# Altium PCB DIOT_SYS_extender_card.PcbDoc (part 3 of 6)
Units mm, origin at the board's own origin, x right, y up, seen from the top; angles counter-clockwise.
Board outline 280.04 x 100 mm, 6 copper layers (Top Layer, L2GND, L3, L4, L5GND, Bottom Layer), stack 1.558 mm thick; 18 components, 344 nets, 1062 pads, 179 vias.
Unrouted connection lines stored in the file: 389.
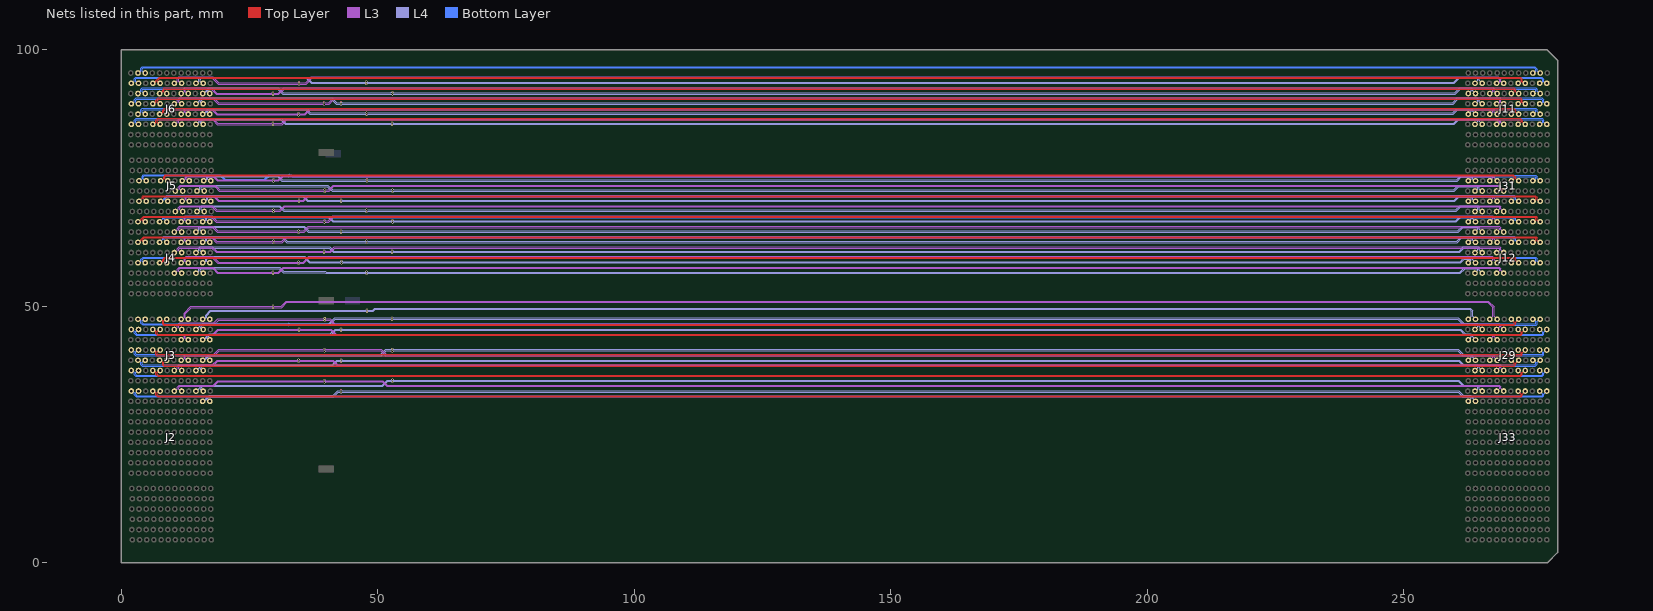
[diagram p7: the nets of this part, all layers, seen from the top]

## Via types
v1: diameter 0.4, hole 0.2, Top Layer to Bottom Layer, tented both sides, 179 vias

## Nets (pads, with @x,y where several pads share a name; then routed paths per layer and width w, separated by ;. In a path a pad name is that pad's centre, name@x,y a point inside that pad or via, vN(x,y) a via of type N, cw(c..) or ccw(c..) an arc to the next point about the centre after c; other vN are vias at no path point) (continued)
SLOT3.LVDS_11_N: J6.B3 J11.B3 | length 276.6
  Bottom Layer w0.11: J6.B3@3.4,85.5 3.16,85.5 2.82,85.84 2.82,86.2 3.045,86.425 37.638,86.425 276.908,86.425 277.119,86.215 277.119,85.9 276.719,85.5 J11.B3@276.539,85.5
SLOT3.LVDS_11_P: J6.A3 J11.A3 | length 277.4
  Bottom Layer w0.11: J6.A3@2,85.5 2.24,85.5 2.58,85.84 2.58,86.299 2.946,86.665 37.638,86.665 277.008,86.665 277.359,86.314 277.359,85.9 277.759,85.5 J11.A3@277.939,85.5
SLOT3.LVDS_12_N: J6.E3 J11.E3 | length 268.2
  Top Layer w0.11: J6.E3@7.6,85.5 7.36,85.5 7.02,85.84 7.02,86.208 7.237,86.425 272.669,86.425 272.919,86.175 272.919,85.975 272.444,85.5 J11.E3@272.339,85.5
SLOT3.LVDS_12_P: J6.D3 J11.D3 | length 269
  Top Layer w0.11: J6.D3@6.2,85.5 6.44,85.5 6.78,85.84 6.78,86.308 7.137,86.665 272.768,86.665 273.159,86.274 273.159,85.975 273.634,85.5 J11.D3@273.739,85.5
SLOT3.LVDS_13_N: J6.H3 J11.H3 | length 260.5
  L3 w0.085: J6.H3@11.8,85.5 11.533,85.5 11.223,85.81 11.223,86.198 11.405,86.38 17.856,86.38 18.781,85.455 29.322,85.455 29.397,85.455 29.515,85.338 v1(29.6,85.338) 29.683,85.338 29.8,85.455 31.42,85.455 32.344,86.38 268.217,86.38 268.716,85.881 268.716,85.81 268.406,85.5 J11.H3@268.139,85.5
SLOT3.LVDS_13_P: J6.G3 J11.G3 | length 261.3
  L3 w0.085: J6.G3@10.4,85.5 10.667,85.5 10.978,85.81 10.978,86.299 11.303,86.625 17.957,86.625 18.882,85.7 29.221,85.7 29.397,85.7 29.515,85.818 v1(29.6,85.818) 29.683,85.818 29.8,85.7 31.318,85.7 32.243,86.625 268.319,86.625 268.961,85.982 268.961,85.81 269.271,85.5 J11.G3@269.539,85.5
SLOT3.LVDS_14_N: J6.K3 J11.K3 | length 251.9
  L4 w0.085: J6.K3@16,85.5 15.733,85.5 15.423,85.81 15.423,85.881 15.914,86.372 31.175,86.372 32.047,85.5 52.657,85.5 52.775,85.383 v1(52.84,85.383) 52.925,85.383 53.042,85.5 259.912,85.5 260.784,86.372 264.394,86.372 264.516,86.25 264.516,86.078 J11.K3@263.939,85.5
SLOT3.LVDS_14_P: J6.J3 J11.J3 | length 252.7
  L4 w0.085: J6.J3@14.6,85.5 14.867,85.5 15.178,85.81 15.178,85.982 15.812,86.617 31.277,86.617 32.149,85.745 52.657,85.745 52.775,85.863 v1(52.84,85.863) 52.925,85.863 53.042,85.745 259.811,85.745 260.683,86.617 264.496,86.617 264.761,86.352 264.761,86.078 J11.J3@265.339,85.5
SLOT4.LVDS_0_N: J3.B3 J29.B3 | length 276.5
  Bottom Layer w0.11: J3.B3@3.4,37.5 3.16,37.5 2.82,37.16 2.82,36.746 2.941,36.625 27.63,36.625 276.925,36.625 277.119,36.819 277.119,37.016 276.634,37.5 J29.B3@276.539,37.5
SLOT4.LVDS_0_P: J3.A3 J29.A3 | length 277.3
  Bottom Layer w0.11: J3.A3@2,37.5 2.24,37.5 2.58,37.16 2.58,36.646 2.841,36.385 27.63,36.385 277.024,36.385 277.359,36.719 277.359,37.016 277.843,37.5 J29.A3@277.939,37.5
SLOT4.LVDS_1_N: J3.E3 J29.E3 | length 268.2
  Top Layer w0.11: J3.E3@7.6,37.5 7.36,37.5 7.02,37.16 7.02,36.805 7.225,36.6 44.999,36.6 272.79,36.6 272.919,36.729 272.919,37.066 272.484,37.5 J29.E3@272.339,37.5
SLOT4.LVDS_1_P: J3.D3 J29.D3 | length 269
  Top Layer w0.11: J3.D3@6.2,37.5 6.44,37.5 6.78,37.16 6.78,36.705 7.125,36.36 44.999,36.36 272.889,36.36 273.159,36.629 273.159,37.066 273.593,37.5 J29.D3@273.739,37.5
SLOT4.LVDS_2_N: J2.L8 J33.L8 | length 249.4
  L4 w0.085: J2.L8@17.3,31.5 17.033,31.5 16.723,31.81 16.723,31.881 17.267,32.425 41.489,32.425 42.364,33.3 42.708,33.3 42.826,33.183 v1(42.911,33.183) 42.996,33.183 43.114,33.3 260.701,33.3 261.576,32.425 263.016,32.425 263.216,32.225 263.216,32.078 J33.L8@262.639,31.5
SLOT4.LVDS_2_P: J2.K8 J33.K8 | length 250.2
  L4 w0.085: J2.K8@15.9,31.5 16.167,31.5 16.478,31.81 16.478,31.982 17.165,32.67 41.388,32.67 42.262,33.545 42.708,33.545 42.826,33.663 v1(42.911,33.663) 42.996,33.663 43.114,33.545 260.802,33.545 261.677,32.67 263.118,32.67 263.461,32.327 263.461,32.078 J33.K8@264.039,31.5
SLOT4.LVDS_3_N: J3.I6 J29.I6 | length 258
  L3 w0.085: J3.I6@13.1,43.5 12.833,43.5 12.523,43.81 12.523,44.239 12.644,44.36 17.96,44.36 18.947,45.347 34.504,45.347 34.572,45.28 v1@34.675,45.28 ; v1(34.707,45.23) 34.792,45.23 34.91,45.347 40.839,45.347 41.826,44.36 267.281,44.36 267.416,44.225 267.416,44.078 J29.I6@266.839,43.5
SLOT4.LVDS_3_P: J3.H6 J29.H6 | length 258.9
  L3 w0.085: J3.H6@11.7,43.5 11.967,43.5 12.278,43.81 12.278,44.34 12.542,44.605 17.859,44.605 18.846,45.592 34.504,45.592 34.562,45.649 34.707,45.649 34.853,45.649 34.91,45.592 40.94,45.592 41.927,44.605 267.383,44.605 267.661,44.327 267.661,44.078 J29.H6@268.239,43.5 ; v1@34.707,45.632 v1(34.707,45.71)
SLOT4.LVDS_4_N: J3.L6 J29.L6 | length 249.4
  L4 w0.085: J3.L6@17.3,43.5 17.033,43.5 16.723,43.81 16.723,43.881 17.242,44.4 40.879,44.4 41.815,45.336 42.645,45.336 42.762,45.218 42.933,45.218 43.05,45.336 261.033,45.336 261.969,44.4 263.016,44.4 263.216,44.2 263.216,44.078 J29.L6@262.639,43.5
  other v1: 42.847,45.218
SLOT4.LVDS_4_P: J3.K6 J29.K6 | length 250.2
  L4 w0.085: J3.K6@15.9,43.5 16.167,43.5 16.478,43.81 16.478,43.982 17.14,44.645 40.778,44.645 41.714,45.581 42.645,45.581 42.702,45.638 42.83,45.638 v1@42.847,45.621 ; v1(42.847,45.698) v1@42.847,45.621 ; J29.K6@264.039,43.5 263.461,44.078 263.461,44.302 263.118,44.645 262.07,44.645 261.135,45.581 43.05,45.581 42.993,45.638 42.865,45.638 v1@42.847,45.621
SLOT4.LVDS_5_N: J4.H3 J12.H3 | length 260.6
  L3 w0.085: J4.H3@11.8,56.5 11.533,56.5 11.223,56.81 11.223,57.181 11.442,57.4 17.833,57.4 18.778,56.455 29.27,56.455 29.395,56.455 29.512,56.338 v1(29.597,56.338) 29.683,56.338 29.8,56.455 30.769,56.455 31.714,57.4 268.591,57.4 268.716,57.275 268.716,57.078 J12.H3@268.139,56.5
SLOT4.LVDS_5_P: J4.G3 J12.G3 | length 261.4
  L3 w0.085: J4.G3@10.4,56.5 10.667,56.5 10.978,56.81 10.978,57.282 11.34,57.645 17.934,57.645 18.879,56.7 29.168,56.7 29.395,56.7 29.512,56.818 v1(29.597,56.818) 29.683,56.818 29.8,56.7 30.667,56.7 31.612,57.645 268.693,57.645 268.961,57.377 268.961,57.078 J12.G3@269.539,56.5
SLOT4.LVDS_6_N: J4.K3 J12.K3 | length 252.1
  L4 w0.085: J4.K3@16,56.5 15.733,56.5 15.423,56.81 15.423,57.172 15.61,57.36 30.793,57.36 31.581,56.573 39.736,56.573 39.864,56.445 47.672,56.445 47.79,56.327 47.96,56.327 48.078,56.445 261.091,56.445 262.007,57.36 264.431,57.36 264.516,57.275 264.516,57.075 263.941,56.5 J12.K3@263.939,56.5
  other v1: 47.875,56.327
SLOT4.LVDS_6_P: J4.J3 J12.J3 | length 253
  L4 w0.085: J4.J3@14.6,56.5 14.867,56.5 15.178,56.81 15.178,57.274 15.509,57.605 30.895,57.605 31.682,56.818 39.837,56.818 39.965,56.69 47.672,56.69 47.73,56.747 47.858,56.747 v1@47.875,56.73 ; v1(47.875,56.807) v1@47.875,56.73 ; J12.J3@265.339,56.5 265.336,56.5 264.761,57.075 264.761,57.377 264.533,57.605 261.905,57.605 260.99,56.69 48.078,56.69 48.021,56.747 47.892,56.747 v1@47.875,56.73
SLOT4.LVDS_7_N: J4.C4 J12.C4 | length 274
  Bottom Layer w0.11: J4.C4@4.7,58.5 4.46,58.5 4.12,58.84 4.12,59.053 4.455,59.388 27.65,59.388 275.72,59.388 275.819,59.289 275.819,58.84 275.479,58.5 J12.C4@275.239,58.5
SLOT4.LVDS_7_P: J4.B4 J12.B4 | length 274.8
  Bottom Layer w0.11: J4.B4@3.3,58.5 3.54,58.5 3.88,58.84 3.88,59.152 4.355,59.628 27.65,59.628 275.82,59.628 276.059,59.388 276.059,58.84 276.399,58.5 J12.B4@276.639,58.5
SLOT4.LVDS_8_N: J4.F4 J12.F4 | length 265.5
  Top Layer w0.11: J4.F4@8.9,58.5 8.66,58.5 8.32,58.84 8.32,59.041 8.649,59.37 49.999,59.37 271.554,59.37 271.619,59.305 271.619,59.12 271.619,58.929 271.189,58.5 J12.F4@271.039,58.5
SLOT4.LVDS_8_P: J4.E4 J12.E4 | length 266.3
  Top Layer w0.11: J4.E4@7.5,58.5 7.74,58.5 8.08,58.84 8.08,59.14 8.549,59.61 49.999,59.61 271.654,59.61 271.859,59.405 271.859,59.021 271.859,58.929 272.288,58.5 J12.E4@272.439,58.5
SLOT4.LVDS_9_N: J4.I4 J12.I4 | length 258.2
  L3 w0.085: J4.I4@13.1,58.5 12.833,58.5 12.523,58.81 12.523,59.161 12.852,59.49 17.784,59.49 18.892,58.382 34.296,58.382 34.421,58.382 34.538,58.265 v1(34.624,58.265) 34.709,58.265 34.826,58.382 35.623,58.382 36.731,59.49 267.229,59.49 267.416,59.303 267.416,59.078 J12.I4@266.839,58.5
SLOT4.LVDS_9_P: J4.H4 J12.H4 | length 259
  L3 w0.085: J4.H4@11.7,58.5 11.967,58.5 12.278,58.81 12.278,59.262 12.75,59.735 17.886,59.735 18.994,58.627 34.195,58.627 34.421,58.627 34.538,58.745 v1(34.624,58.745) 34.709,58.745 34.826,58.627 35.522,58.627 36.63,59.735 267.331,59.735 267.661,59.405 267.661,59.078 J12.H4@268.239,58.5
SLOT4.LVDS_10_N: J4.L4 J12.L4 | length 249.5
  L4 w0.085: J4.L4@17.3,58.5 17.033,58.5 16.723,58.81 16.723,59.205 17.076,59.559 35.657,59.559 36.716,58.5 42.765,58.5 42.883,58.382 v1(42.968,58.382) 43.053,58.382 43.171,58.5 261.146,58.5 261.887,59.241 263.151,59.241 263.216,59.175 263.216,59.078 J12.L4@262.639,58.5
SLOT4.LVDS_10_P: J4.K4 J12.K4 | length 250.3
  L4 w0.085: J4.K4@15.9,58.5 16.167,58.5 16.478,58.81 16.478,59.307 16.974,59.804 35.759,59.804 36.818,58.745 42.765,58.745 42.883,58.862 v1(42.968,58.862) 43.053,58.862 43.171,58.745 261.045,58.745 261.786,59.486 263.252,59.486 263.461,59.277 263.461,59.078 J12.K4@264.039,58.5
SLOT4.LVDS_11_N: J6.C4 J11.C4 | length 274
  Bottom Layer w0.11: J6.C4@4.7,87.5 4.46,87.5 4.12,87.84 4.12,88.22 4.275,88.375 32.638,88.375 275.669,88.375 275.819,88.225 275.819,88.1 275.819,87.975 275.344,87.5 J11.C4@275.239,87.5
SLOT4.LVDS_11_P: J6.B4 J11.B4 | length 274.7
  Bottom Layer w0.11: J6.B4@3.3,87.5 3.54,87.5 3.88,87.84 3.88,88.319 4.176,88.615 32.638,88.615 275.768,88.615 276.059,88.324 276.059,88.225 276.059,87.975 276.534,87.5 J11.B4@276.639,87.5
SLOT4.LVDS_12_N: J6.F4 J11.F4 | length 265.6
  Top Layer w0.11: J6.F4@8.9,87.5 8.66,87.5 8.32,87.84 8.32,88.181 8.514,88.375 271.418,88.375 271.619,88.175 271.619,87.845 271.274,87.5 J11.F4@271.039,87.5
SLOT4.LVDS_12_P: J6.E4 J11.E4 | length 266.4
  Top Layer w0.11: J6.E4@7.5,87.5 7.74,87.5 8.08,87.84 8.08,88.28 8.415,88.615 271.518,88.615 271.859,88.274 271.859,87.845 272.204,87.5 J11.E4@272.439,87.5
SLOT4.LVDS_13_N: J6.I4 J11.I4 | length 258.2
  L3 w0.085: J6.I4@13.1,87.5 12.833,87.5 12.523,87.81 12.523,88.249 12.644,88.37 17.666,88.37 18.681,87.355 34.23,87.355 34.412,87.355 34.53,87.238 v1(34.615,87.238) 34.683,87.238 34.8,87.355 35.867,87.355 36.882,88.37 267.295,88.37 267.416,88.249 267.416,87.81 267.106,87.5 J11.I4@266.839,87.5
SLOT4.LVDS_13_P: J6.H4 J11.H4 | length 259
  L3 w0.085: J6.H4@11.7,87.5 11.967,87.5 12.278,87.81 12.278,88.35 12.542,88.615 17.767,88.615 18.782,87.6 34.128,87.6 34.412,87.6 34.53,87.718 v1(34.615,87.718) 34.683,87.718 34.8,87.6 35.766,87.6 36.781,88.615 37.73,88.615 267.396,88.615 267.661,88.35 267.661,87.81 267.971,87.5 J11.H4@268.239,87.5
SLOT4.LVDS_14_N: J6.L4 J11.L4 | length 249.3
  L4 w0.085: J6.L4@17.3,87.5 17.033,87.5 16.723,87.81 16.723,87.881 17.217,88.375 35.913,88.375 36.816,87.473 47.6,87.473 47.657,87.415 47.825,87.415 v1(47.885,87.355) 47.97,87.355 48.088,87.473 259.716,87.473 260.618,88.375 263.016,88.375 263.216,88.175 263.216,88.078 J11.L4@262.639,87.5
SLOT4.LVDS_14_P: J6.K4 J11.K4 | length 250.1
  L4 w0.085: J6.K4@15.9,87.5 16.167,87.5 16.478,87.81 16.478,87.982 17.115,88.62 36.015,88.62 36.917,87.718 47.6,87.718 47.657,87.775 47.825,87.775 v1(47.885,87.835) 47.97,87.835 48.088,87.718 259.614,87.718 260.517,88.62 263.118,88.62 263.461,88.277 263.461,88.078 J11.K4@264.039,87.5
SLOT5.LVDS_0_N: J3.H3 J29.H3 | length 260.6
  L3 w0.085: J3.H3@11.8,37.5 11.533,37.5 11.223,37.81 11.223,38.141 11.482,38.4 17.916,38.4 18.816,39.3 34.415,39.3 34.532,39.183 v1(34.617,39.183) 34.703,39.183 34.82,39.3 41.262,39.3 42.162,38.4 268.666,38.4 268.716,38.35 268.716,38.078 J29.H3@268.139,37.5
SLOT5.LVDS_0_P: J3.G3 J29.G3 | length 261.4
  L3 w0.085: J3.G3@10.4,37.5 10.667,37.5 10.978,37.81 10.978,38.242 11.38,38.645 17.814,38.645 18.714,39.545 34.415,39.545 34.532,39.663 v1(34.617,39.663) 34.703,39.663 34.82,39.545 41.364,39.545 42.264,38.645 268.768,38.645 268.961,38.452 268.961,38.078 J29.G3@269.539,37.5
SLOT5.LVDS_1_N: J3.K3 J29.K3 | length 252
  L4 w0.085: J3.K3@16,37.5 15.733,37.5 15.423,37.81 15.423,37.881 15.967,38.425 41.272,38.425 42.146,39.3 42.826,39.3 42.901,39.225 v1(42.901,39.183) 42.986,39.183 43.104,39.3 260.756,39.3 261.631,38.425 264.316,38.425 264.516,38.225 264.516,38.078 J29.K3@263.939,37.5
SLOT5.LVDS_1_P: J3.J3 J29.J3 | length 252.8
  L4 w0.085: J3.J3@14.6,37.5 14.867,37.5 15.178,37.81 15.178,37.982 15.865,38.67 41.17,38.67 42.045,39.545 42.826,39.545 42.901,39.62 v1(42.901,39.663) 42.986,39.663 43.104,39.545 260.857,39.545 261.732,38.67 264.418,38.67 264.761,38.327 264.761,38.078 J29.J3@265.339,37.5
SLOT5.LVDS_2_N: J3.B1 J29.B1 | length 276.5
  Bottom Layer w0.11: J3.B1@3.4,33.5 3.16,33.5 2.82,33.16 2.82,32.875 3.07,32.625 37.649,32.625 277.022,32.625 277.119,32.721 277.119,32.92 J29.B1@276.539,33.5
SLOT5.LVDS_2_P: J3.A1 J29.A1 | length 277.3
  Bottom Layer w0.11: J3.A1@2,33.5 2.24,33.5 2.58,33.16 2.58,32.776 2.971,32.385 37.649,32.385 277.122,32.385 277.359,32.622 277.359,32.92 J29.A1@277.939,33.5
SLOT5.LVDS_3_N: J3.B7 J29.B7 | length 276.6
  Bottom Layer w0.11: J3.B7@3.4,45.5 3.16,45.5 2.82,45.16 2.82,44.825 3.045,44.6 37.646,44.6 277.012,44.6 277.119,44.707 277.119,44.991 276.609,45.5 J29.B7@276.539,45.5
SLOT5.LVDS_3_P: J3.A7 J29.A7 | length 277.4
  Bottom Layer w0.11: J3.A7@2,45.5 2.24,45.5 2.58,45.16 2.58,44.726 2.946,44.36 37.646,44.36 277.111,44.36 277.359,44.608 277.359,44.991 277.868,45.5 J29.A7@277.939,45.5
SLOT5.LVDS_4_N: J3.E7 J29.E7 | length 268.2
  Top Layer w0.11: J3.E7@7.6,45.5 7.36,45.5 7.02,45.16 7.02,44.741 7.161,44.6 50.002,44.6 272.823,44.6 272.919,44.696 272.919,44.966 272.384,45.5 J29.E7@272.339,45.5
SLOT5.LVDS_4_P: J3.D7 J29.D7 | length 269
  Top Layer w0.11: J3.D7@6.2,45.5 6.44,45.5 6.78,45.16 6.78,44.642 7.062,44.36 50.002,44.36 272.922,44.36 273.159,44.597 273.159,44.966 273.693,45.5 J29.D7@273.739,45.5
SLOT5.LVDS_5_N: J4.H5 J12.H5 | length 260.5
  L3 w0.085: J4.H5@11.8,60.5 11.533,60.5 11.223,60.81 11.223,61.148 11.442,61.367 17.707,61.367 18.519,60.555 39.27,60.555 39.395,60.555 39.512,60.438 v1(39.597,60.438) 39.683,60.438 39.8,60.555 40.855,60.555 41.667,61.367 268.666,61.367 268.716,61.317 268.716,61.078 J12.H5@268.139,60.5
SLOT5.LVDS_5_P: J4.G5 J12.G5 | length 261.3
  L3 w0.085: J4.G5@10.4,60.5 10.667,60.5 10.978,60.81 10.978,61.249 11.34,61.612 17.809,61.612 18.62,60.8 39.168,60.8 39.395,60.8 39.512,60.918 v1(39.597,60.918) 39.683,60.918 39.8,60.8 40.754,60.8 41.565,61.612 268.768,61.612 268.961,61.418 268.961,61.078 J12.G5@269.539,60.5
SLOT5.LVDS_6_N: J4.K5 J12.K5 | length 252.1
  L4 w0.085: J4.K5@16,60.5 15.733,60.5 15.423,60.81 15.423,61.241 15.548,61.367 40.594,61.367 41.405,60.555 52.657,60.555 52.775,60.438 v1(52.84,60.438) 52.925,60.438 53.042,60.555 260.921,60.555 261.733,61.367 264.46,61.367 264.516,61.311 264.516,61.078 J12.K5@263.939,60.5
SLOT5.LVDS_6_P: J4.J5 J12.J5 | length 252.9
  L4 w0.085: J4.J5@14.6,60.5 14.867,60.5 15.178,60.81 15.178,61.343 15.446,61.612 40.695,61.612 41.507,60.8 52.657,60.8 52.775,60.918 v1(52.84,60.918) 52.925,60.918 53.042,60.8 260.82,60.8 261.631,61.612 264.562,61.612 264.761,61.412 264.761,61.078 J12.J5@265.339,60.5
SLOT5.LVDS_7_N: J4.C6 J12.C6 | length 273.9
  Top Layer w0.11: J4.C6@4.7,62.5 4.46,62.5 4.12,62.84 4.12,62.931 4.549,63.36 275.734,63.36 275.819,63.275 275.819,63.031 275.819,62.84 275.479,62.5 J12.C6@275.239,62.5
SLOT5.LVDS_7_P: J4.B6 J12.B6 | length 274.7
  Top Layer w0.11: J4.B6@3.3,62.5 3.54,62.5 3.88,62.84 3.88,63.031 4.449,63.6 275.833,63.6 276.059,63.374 276.059,62.931 276.059,62.84 276.399,62.5 J12.B6@276.639,62.5
SLOT5.LVDS_8_N: J4.F6 J12.F6 | length 265.5
  Bottom Layer w0.11: J4.F6@8.9,62.5 8.32,63.08 8.32,63.295 8.417,63.392 271.442,63.392 271.619,63.216 271.619,62.84 271.279,62.5 J12.F6@271.039,62.5
SLOT5.LVDS_8_P: J4.E6 J12.E6 | length 266.3
  Bottom Layer w0.11: J4.E6@7.5,62.5 8.08,63.08 8.08,63.394 8.317,63.632 271.542,63.632 271.859,63.315 271.859,62.84 272.199,62.5 J12.E6@272.439,62.5
SLOT5.LVDS_9_N: J4.I6 J12.I6 | length 258
  L3 w0.085: J4.I6@13.1,62.5 12.833,62.5 12.523,62.81 12.523,63.239 12.644,63.36 17.69,63.36 18.595,62.455 29.27,62.455 29.48,62.455 29.597,62.338 v1(29.683,62.338) 29.711,62.338 29.828,62.455 31.426,62.455 32.331,63.36 267.306,63.36 267.416,63.25 267.416,63.078 J12.I6@266.839,62.5
SLOT5.LVDS_9_P: J4.H6 J12.H6 | length 258.8
  L3 w0.085: J4.H6@11.7,62.5 11.967,62.5 12.278,62.81 12.278,63.34 12.542,63.605 17.792,63.605 18.697,62.7 29.169,62.7 29.48,62.7 29.597,62.818 v1(29.683,62.818) 29.711,62.818 29.828,62.7 31.325,62.7 32.23,63.605 267.408,63.605 267.661,63.352 267.661,63.078 J12.H6@268.239,62.5
SLOT5.LVDS_10_N: J4.L6 J12.L6 | length 249.6
  L4 w0.085: J4.L6@17.3,62.5 17.033,62.5 16.723,62.81 16.723,63.165 16.918,63.36 31.422,63.36 32.327,62.455 47.683,62.455 47.8,62.338 v1(47.885,62.338) 47.97,62.338 48.088,62.455 260.474,62.455 261.379,63.36 263.156,63.36 263.216,63.3 263.216,62.925 262.791,62.5 J12.L6@262.639,62.5
SLOT5.LVDS_10_P: J4.K6 J12.K6 | length 250.4
  L4 w0.085: J4.K6@15.9,62.5 16.167,62.5 16.478,62.81 16.478,63.266 16.816,63.605 31.524,63.605 32.429,62.7 47.683,62.7 47.8,62.818 v1(47.885,62.818) 47.97,62.818 48.088,62.7 260.373,62.7 261.278,63.605 263.258,63.605 263.461,63.402 263.461,62.925 263.886,62.5 J12.K6@264.039,62.5
SLOT5.LVDS_11_N: J6.B5 J11.B5 | length 276.6
  Bottom Layer w0.11: J6.B5@3.4,89.5 3.16,89.5 2.82,89.84 2.82,90.174 3.035,90.389 27.654,90.389 276.884,90.389 277.119,90.155 277.119,90.031 277.119,89.84 276.779,89.5 J11.B5@276.539,89.5
SLOT5.LVDS_11_P: J6.A5 J11.A5 | length 277.4
  Bottom Layer w0.11: J6.A5@2,89.5 2.24,89.5 2.58,89.84 2.58,90.274 2.936,90.629 27.654,90.629 276.984,90.629 277.359,90.254 277.359,89.931 277.359,89.84 277.699,89.5 J11.A5@277.939,89.5
SLOT5.LVDS_12_N: J6.E5 J11.E5 | length 268.1
  Top Layer w0.11: J6.E5@7.6,89.5 7.36,89.5 7.02,89.84 7.02,90.045 7.375,90.4 272.725,90.4 272.919,90.206 272.919,90.031 272.919,89.84 272.579,89.5 J11.E5@272.339,89.5
SLOT5.LVDS_12_P: J6.D5 J11.D5 | length 268.9
  Top Layer w0.11: J6.D5@6.2,89.5 6.44,89.5 6.78,89.84 6.78,90.144 7.276,90.64 272.824,90.64 273.159,90.306 273.159,89.931 273.159,89.84 273.499,89.5 J11.D5@273.739,89.5
SLOT5.LVDS_13_N: J6.H5 J11.H5 | length 260.7
  L3 w0.085: J6.H5@11.8,89.5 11.533,89.5 11.223,89.81 11.223,90.078 11.536,90.391 17.962,90.391 18.899,89.455 39.271,89.455 39.396,89.455 39.513,89.338 v1(39.598,89.338) 39.683,89.338 39.8,89.455 40.555,89.455 41.491,90.391 50.325,90.391 268.626,90.391 268.716,90.301 268.716,89.81 268.406,89.5 J11.H5@268.139,89.5
SLOT5.LVDS_13_P: J6.G5 J11.G5 | length 261.5
  L3 w0.085: J6.G5@10.4,89.5 10.667,89.5 10.978,89.81 10.978,90.179 11.435,90.636 18.064,90.636 19,89.7 39.169,89.7 39.396,89.7 39.513,89.818 v1(39.598,89.818) 39.683,89.818 39.8,89.7 40.454,89.7 41.39,90.636 51.523,90.636 268.727,90.636 268.961,90.403 268.961,89.81 269.271,89.5 J11.G5@269.539,89.5
SLOT5.LVDS_14_N: J6.K5 J11.K5 | length 252
  L4 w0.085: J6.K5@16,89.5 15.733,89.5 15.423,89.81 15.423,89.881 15.941,90.399 41.001,90.399 41.945,89.455 42.7,89.455 42.817,89.338 v1(42.885,89.338) 42.97,89.338 43.088,89.455 259.657,89.455 260.602,90.399 264.201,90.399 264.516,90.084 264.516,89.944 264.072,89.5 J11.K5@263.939,89.5
SLOT5.LVDS_14_P: J6.J5 J11.J5 | length 252.8
  L4 w0.085: J6.J5@14.6,89.5 14.867,89.5 15.178,89.81 15.178,89.982 15.84,90.644 41.102,90.644 42.046,89.7 42.7,89.7 42.818,89.818 v1(42.885,89.818) 42.97,89.818 43.088,89.7 259.556,89.7 260.5,90.644 264.302,90.644 264.761,90.185 264.761,89.944 265.205,89.5 J11.J5@265.339,89.5
SLOT6.LVDS_0_N: J3.C4 J29.C4 | length 274
  Bottom Layer w0.11: J3.C4@4.7,39.5 4.46,39.5 4.12,39.16 4.12,38.711 4.231,38.6 37.66,38.6 275.625,38.6 275.819,38.794 275.819,39.066 275.384,39.5 J29.C4@275.239,39.5
SLOT6.LVDS_0_P: J3.B4 J29.B4 | length 274.8
  Bottom Layer w0.11: J3.B4@3.3,39.5 3.54,39.5 3.88,39.16 3.88,38.611 4.131,38.36 37.66,38.36 275.724,38.36 276.059,38.694 276.059,39.066 276.493,39.5 J29.B4@276.639,39.5
SLOT6.LVDS_1_N: J3.F4 J29.F4 | length 265.6
  Top Layer w0.11: J3.F4@8.9,39.5 8.66,39.5 8.32,39.16 8.32,38.664 8.384,38.6 50.002,38.6 271.519,38.6 271.619,38.699 271.619,38.941 271.059,39.5 J29.F4@271.039,39.5
SLOT6.LVDS_1_P: J3.E4 J29.E4 | length 266.4
  Top Layer w0.11: J3.E4@7.5,39.5 7.74,39.5 8.08,39.16 8.08,38.565 8.285,38.36 50.002,38.36 271.619,38.36 271.859,38.6 271.859,38.941 272.418,39.5 J29.E4@272.439,39.5
SLOT6.LVDS_2_N: J3.E1 J29.E1 | length 268.1
  Top Layer w0.11: J3.E1@7.6,33.5 7.36,33.5 7.02,33.16 7.02,32.792 7.205,32.608 49.999,32.608 272.833,32.608 272.919,32.694 272.919,32.92 J29.E1@272.339,33.5
SLOT6.LVDS_2_P: J3.D1 J29.D1 | length 268.9
  Top Layer w0.11: J3.D1@6.2,33.5 6.44,33.5 6.78,33.16 6.78,32.693 7.105,32.368 49.999,32.368 272.932,32.368 273.159,32.594 273.159,32.92 J29.D1@273.739,33.5
SLOT6.LVDS_3_N: J3.H7 J29.H7 | length 260.6
  L3 w0.085: J3.H7@11.8,45.5 11.533,45.5 11.223,45.81 11.223,46.233 11.535,46.546 18.211,46.546 18.994,47.329 39.497,47.329 39.615,47.211 v1(39.7,47.211) 39.739,47.211 39.857,47.329 40.638,47.329 41.582,46.385 268.606,46.385 268.716,46.275 268.716,46.078 J29.H7@268.139,45.5
SLOT6.LVDS_3_P: J3.G7 J29.G7 | length 261.4
  L3 w0.085: J3.G7@10.4,45.5 10.667,45.5 10.978,45.81 10.978,46.335 11.434,46.791 18.109,46.791 18.892,47.574 39.497,47.574 39.615,47.691 v1(39.7,47.691) 39.739,47.691 39.857,47.574 40.74,47.574 41.683,46.63 268.708,46.63 268.961,46.377 268.961,46.078 J29.G7@269.539,45.5
SLOT6.LVDS_4_N: J3.K7 J29.K7 | length 252.1
  L4 w0.085: J3.K7@16,45.5 15.733,45.5 15.423,45.81 15.423,45.881 15.927,46.385 40.579,46.385 41.712,47.518 52.512,47.518 52.637,47.518 52.754,47.401 v1(52.84,47.401) 52.925,47.401 53.042,47.518 260.563,47.518 261.696,46.385 264.356,46.385 264.516,46.225 264.516,46.078 J29.K7@263.939,45.5
SLOT6.LVDS_4_P: J3.J7 J29.J7 | length 253
  L4 w0.085: J3.J7@14.6,45.5 14.867,45.5 15.178,45.81 15.178,45.982 15.825,46.63 40.478,46.63 41.611,47.763 52.411,47.763 52.637,47.763 52.754,47.881 v1(52.84,47.881) 52.925,47.881 53.042,47.763 260.665,47.763 261.798,46.63 264.458,46.63 264.761,46.327 264.761,46.078 J29.J7@265.339,45.5
SLOT6.LVDS_5_N: J4.H7 J12.H7 | length 260.4
  L3 w0.085: J4.H7@11.8,64.5 11.533,64.5 11.223,64.81 11.223,65.081 11.476,65.335 17.895,65.335 18.775,64.455 34.346,64.455 34.421,64.455 34.538,64.338 v1(34.624,64.338) 34.703,64.338 34.82,64.455 35.745,64.455 36.625,65.335 268.581,65.335 268.716,65.2 268.716,65.078 J12.H7@268.139,64.5
SLOT6.LVDS_5_P: J4.G7 J12.G7 | length 261.2
  L3 w0.085: J4.G7@10.4,64.5 10.667,64.5 10.978,64.81 10.978,65.183 11.375,65.58 17.996,65.58 18.876,64.7 34.244,64.7 34.421,64.7 34.538,64.818 v1(34.624,64.818) 34.703,64.818 34.82,64.7 35.643,64.7 36.523,65.58 268.683,65.58 268.961,65.302 268.961,65.078 J12.G7@269.539,64.5
SLOT6.LVDS_6_N: J4.K7 J12.K7 | length 252.3
  L4 w0.085: J4.K7@16,64.5 15.733,64.5 15.423,64.81 15.423,65.327 15.496,65.4 35.583,65.4 36.528,64.455 42.7,64.455 42.817,64.338 v1(42.901,64.338) 42.986,64.338 43.104,64.455 260.677,64.455 261.622,65.4 264.414,65.4 264.516,65.298 264.516,65.078 J12.K7@263.939,64.5
SLOT6.LVDS_6_P: J4.J7 J12.J7 | length 253.1
  L4 w0.085: J4.J7@14.6,64.5 14.867,64.5 15.178,64.81 15.178,65.428 15.394,65.645 35.685,65.645 36.63,64.7 42.7,64.7 42.818,64.818 v1(42.901,64.818) 42.986,64.818 43.104,64.7 260.575,64.7 261.52,65.645 264.516,65.645 264.761,65.4 264.761,65.078 J12.J7@265.339,64.5
SLOT6.LVDS_7_N: J4.C8 J12.C8 | length 273.9
  Top Layer w0.11: J4.C8@4.7,66.5 4.46,66.5 4.12,66.84 4.12,66.931 4.549,67.36 275.754,67.36 275.819,67.296 275.819,67.031 275.819,66.84 275.479,66.5 J12.C8@275.239,66.5
SLOT6.LVDS_7_P: J4.B8 J12.B8 | length 274.7
  Top Layer w0.11: J4.B8@3.3,66.5 3.54,66.5 3.88,66.84 3.88,67.031 4.449,67.6 275.854,67.6 276.059,67.395 276.059,66.931 276.059,66.84 276.399,66.5 J12.B8@276.639,66.5
SLOT6.LVDS_8_N: J4.F8 J12.F8 | length 265.4
  Bottom Layer w0.11: J4.F8@8.9,66.5 8.336,67.064 8.336,67.155 8.508,67.326 271.503,67.326 271.619,67.211 271.619,66.84 271.279,66.5 J12.F8@271.039,66.5
SLOT6.LVDS_8_P: J4.E8 J12.E8 | length 266.2
  Bottom Layer w0.11: J4.E8@7.5,66.5 8.096,67.096 8.096,67.254 8.408,67.566 271.602,67.566 271.859,67.31 271.859,66.84 272.199,66.5 J12.E8@272.439,66.5
SLOT6.LVDS_9_N: J4.I8 J12.I8 | length 258.1
  L3 w0.085: J4.I8@13.1,66.5 12.833,66.5 12.523,66.81 12.523,67.294 12.628,67.4 17.627,67.4 18.579,66.448 39.337,66.448 39.412,66.448 39.53,66.331 v1(39.615,66.331) 39.7,66.331 39.818,66.448 40.448,66.448 41.4,67.4 267.266,67.4 267.416,67.25 267.416,67.078 J12.I8@266.839,66.5
SLOT6.LVDS_9_P: J4.H8 J12.H8 | length 258.9
  L3 w0.085: J4.H8@11.7,66.5 11.967,66.5 12.278,66.81 12.278,67.396 12.527,67.645 17.729,67.645 18.681,66.693 39.236,66.693 39.412,66.693 39.53,66.811 v1(39.615,66.811) 39.7,66.811 39.818,66.693 40.347,66.693 41.299,67.645 267.368,67.645 267.661,67.352 267.661,67.078 J12.H8@268.239,66.5
SLOT6.LVDS_10_N: J4.L8 J12.L8 | length 249.6
  L4 w0.085: J4.L8@17.3,66.5 17.033,66.5 16.723,66.81 16.723,67.286 16.797,67.36 40.395,67.36 41.3,66.455 52.775,66.455 52.892,66.338 v1(52.925,66.338) 53.01,66.338 53.128,66.455 260.241,66.455 261.146,67.36 263.081,67.36 263.216,67.225 263.216,67.078 J12.L8@262.639,66.5
SLOT6.LVDS_10_P: J4.K8 J12.K8 | length 250.4
  L4 w0.085: J4.K8@15.9,66.5 16.167,66.5 16.478,66.81 16.478,67.387 16.695,67.605 40.496,67.605 41.401,66.7 52.775,66.7 52.892,66.818 v1(52.925,66.818) 53.01,66.818 53.128,66.7 260.139,66.7 261.044,67.605 263.183,67.605 263.461,67.327 263.461,67.078 J12.K8@264.039,66.5
SLOT6.LVDS_11_N: J6.C6 J11.C6 | length 273.9
  Bottom Layer w0.11: J6.C6@4.7,91.5 4.46,91.5 4.12,91.84 4.12,92.2 4.27,92.35 37.502,92.35 275.725,92.35 275.819,92.256 275.819,91.986 275.332,91.5 J11.C6@275.239,91.5
SLOT6.LVDS_11_P: J6.B6 J11.B6 | length 274.7
  Bottom Layer w0.11: J6.B6@3.3,91.5 3.54,91.5 3.88,91.84 3.88,92.299 4.171,92.59 37.502,92.59 275.824,92.59 276.059,92.356 276.059,91.986 276.545,91.5 J11.B6@276.639,91.5
SLOT6.LVDS_12_N: J6.F6 J11.F6 | length 265.5
  Top Layer w0.11: J6.F6@8.9,91.5 8.66,91.5 8.32,91.84 8.32,92.145 8.533,92.358 271.386,92.358 271.619,92.125 271.619,92.031 271.619,91.84 271.279,91.5 J11.F6@271.039,91.5
SLOT6.LVDS_12_P: J6.E6 J11.E6 | length 266.3
  Top Layer w0.11: J6.E6@7.5,91.5 7.74,91.5 8.08,91.84 8.08,92.244 8.434,92.598 271.485,92.598 271.859,92.224 271.859,91.931 271.859,91.84 272.199,91.5 J11.E6@272.439,91.5
SLOT6.LVDS_13_N: J6.I6 J11.I6 | length 258.3
  L3 w0.085: J6.I6@13.1,91.5 12.833,91.5 12.523,91.81 12.523,92.095 12.517,92.1 12.517,92.325 12.567,92.375 17.559,92.375 18.579,91.355 29.322,91.355 29.397,91.355 29.515,91.238 v1(29.6,91.238) 29.683,91.238 29.8,91.355 30.755,91.355 31.775,92.375 267.261,92.375 267.416,92.219 267.416,91.81 267.106,91.5 J11.I6@266.839,91.5
SLOT6.LVDS_13_P: J6.H6 J11.H6 | length 259.1
  L3 w0.085: J6.H6@11.7,91.5 11.967,91.5 12.278,91.81 12.278,91.993 12.272,91.999 12.272,92.427 12.466,92.62 17.661,92.62 18.681,91.6 29.221,91.6 29.397,91.6 29.515,91.718 v1(29.6,91.718) 29.683,91.718 29.8,91.6 30.654,91.6 31.674,92.62 267.362,92.62 267.661,92.321 267.661,91.81 267.971,91.5 J11.H6@268.239,91.5
SLOT6.LVDS_14_N: J6.L6 J11.L6 | length 249.4
  L4 w0.085: J6.L6@17.3,91.5 17.033,91.5 16.723,91.81 16.723,91.881 17.214,92.372 30.521,92.372 31.493,91.4 52.6,91.4 52.657,91.343 52.84,91.343 v1(52.9,91.283) 52.985,91.283 53.103,91.4 53.228,91.4 260.064,91.4 261.036,92.372 263.07,92.372 263.183,92.259 263.183,92.044 J11.L6@262.639,91.5
SLOT6.LVDS_14_P: J6.K6 J11.K6 | length 250.2
  L4 w0.085: J6.K6@15.9,91.5 16.167,91.5 16.478,91.81 16.478,91.982 17.112,92.617 30.623,92.617 31.594,91.645 52.6,91.645 52.657,91.702 52.84,91.702 v1(52.9,91.763) 52.985,91.763 53.103,91.645 53.329,91.645 259.963,91.645 260.935,92.617 263.171,92.617 263.428,92.36 263.428,92.111 J11.K6@264.039,91.5
SLOT7.LVDS_0_N: J3.I4 J29.I4 | length 258.1
  L3 w0.085: J3.I4@13.1,39.5 12.833,39.5 12.523,39.81 12.523,40.287 12.615,40.38 18.121,40.38 19.096,41.355 39.412,41.355 39.53,41.238 v1(39.615,41.238) 39.7,41.238 39.818,41.355 50.665,41.355 51.64,40.38 267.317,40.38 267.416,40.281 267.416,40.078 J29.I4@266.839,39.5
SLOT7.LVDS_0_P: J3.H4 J29.H4 | length 258.9
  L3 w0.085: J3.H4@11.7,39.5 11.967,39.5 12.278,39.81 12.278,40.389 12.514,40.625 18.019,40.625 18.994,41.6 39.412,41.6 39.53,41.718 v1(39.615,41.718) 39.7,41.718 39.818,41.6 50.766,41.6 51.741,40.625 267.418,40.625 267.661,40.382 267.661,40.078 J29.H4@268.239,39.5
SLOT7.LVDS_1_N: J3.L4 J29.L4 | length 249.4
  L4 w0.085: J3.L4@17.3,39.5 17.033,39.5 16.723,39.81 16.723,39.881 17.258,40.416 50.746,40.416 51.693,41.362 52.5,41.362 52.557,41.305 52.808,41.305 v1(52.869,41.245) 52.954,41.245 53.071,41.362 260.565,41.362 261.512,40.416 263,40.416 263.216,40.2 263.216,40.078 J29.L4@262.639,39.5
SLOT7.LVDS_1_P: J3.K4 J29.K4 | length 250.2
  L4 w0.085: J3.K4@15.9,39.5 16.167,39.5 16.478,39.81 16.478,39.982 17.156,40.661 50.645,40.661 51.591,41.607 52.5,41.607 52.557,41.664 52.808,41.664 v1(52.869,41.725) 52.954,41.725 53.071,41.607 260.667,41.607 261.613,40.661 263.102,40.661 263.461,40.302 263.461,40.078 J29.K4@264.039,39.5
SLOT7.LVDS_2_N: J3.H1 J29.H1 | length 260.5
  L3 w0.085: J3.H1@11.8,33.5 11.533,33.5 11.223,33.81 11.223,34.166 11.446,34.389 18.047,34.389 18.957,35.3 39.412,35.3 39.53,35.183 v1(39.615,35.183) 39.7,35.183 39.818,35.3 50.893,35.3 51.803,34.389 268.527,34.389 268.716,34.2 268.716,34.078 J29.H1@268.139,33.5
SLOT7.LVDS_2_P: J3.G1 J29.G1 | length 261.3
  L3 w0.085: J3.G1@10.4,33.5 10.667,33.5 10.978,33.81 10.978,34.267 11.345,34.634 17.945,34.634 18.856,35.545 39.412,35.545 39.53,35.663 v1(39.615,35.663) 39.7,35.663 39.818,35.545 50.994,35.545 51.905,34.634 268.628,34.634 268.961,34.302 268.961,34.078 J29.G1@269.539,33.5
SLOT7.LVDS_3_N: J3.C8 J29.C8 | length 274.1
  Bottom Layer w0.11: J3.C8@4.7,47.5 4.46,47.5 4.12,47.16 4.12,46.835 4.33,46.625 32.629,46.625 ; 32.629,46.821 32.824,46.626 32.936,46.626 32.939,46.623 33.299,46.623 33.322,46.6 275.754,46.6 275.819,46.664 275.819,47.062 275.381,47.5 J29.C8@275.239,47.5
SLOT7.LVDS_3_P: J3.B8 J29.B8 | length 274.9
  Bottom Layer w0.11: J3.B8@3.3,47.5 3.54,47.5 3.88,47.16 3.88,46.736 4.231,46.385 32.629,46.385 ; 32.629,46.186 32.824,46.381 32.936,46.381 32.939,46.383 33.199,46.383 33.223,46.36 275.854,46.36 276.059,46.565 276.059,47.062 276.496,47.5 J29.B8@276.639,47.5
SLOT7.LVDS_4_N: J3.F8 J29.F8 | length 265.7
  Top Layer w0.11: J3.F8@8.9,47.5 8.66,47.5 8.32,47.16 8.32,46.659 8.425,46.554 55.012,46.554 271.521,46.554 271.619,46.653 271.619,46.941 271.059,47.5 J29.F8@271.039,47.5
SLOT7.LVDS_4_P: J3.E8 J29.E8 | length 266.5
  Top Layer w0.11: J3.E8@7.5,47.5 7.74,47.5 8.08,47.16 8.08,46.56 8.325,46.314 55.012,46.314 271.62,46.314 271.859,46.553 271.859,46.941 272.418,47.5 J29.E8@272.439,47.5
SLOT7.LVDS_5_N: J5.H1 J31.H1 | length 260.4
  L3 w0.085: J5.H1@12,68.5 11.733,68.5 11.423,68.81 11.423,69.168 11.665,69.411 17.706,69.411 18.552,68.565 29.27,68.565 29.48,68.565 29.597,68.448 v1(29.683,68.448) 29.711,68.448 29.828,68.565 31.037,68.565 31.883,69.411 268.63,69.411 268.716,69.325 268.716,69.078 J31.H1@268.139,68.5
SLOT7.LVDS_5_P: J5.G1 J31.G1 | length 261.2
  L3 w0.085: J5.G1@10.6,68.5 10.867,68.5 11.178,68.81 11.178,69.27 11.564,69.656 17.808,69.656 18.654,68.81 29.169,68.81 29.48,68.81 29.597,68.928 v1(29.683,68.928) 29.711,68.928 29.828,68.81 30.936,68.81 31.781,69.656 268.732,69.656 268.961,69.427 268.961,69.078 J31.G1@269.539,68.5
SLOT7.LVDS_6_N: J5.K1 J31.K1 | length 252.1
  L4 w0.085: J5.K1@16.2,68.5 15.933,68.5 15.623,68.81 15.623,69.193 15.84,69.411 30.824,69.411 31.68,68.555 47.6,68.555 47.657,68.498 47.825,68.498 v1(47.885,68.438) 47.97,68.438 48.088,68.555 48.213,68.555 260.273,68.555 261.129,69.411 264.381,69.411 264.516,69.276 264.516,68.81 264.206,68.5 J31.K1@263.939,68.5
SLOT7.LVDS_6_P: J5.J1 J31.J1 | length 252.9
  L4 w0.085: J5.J1@14.8,68.5 15.067,68.5 15.378,68.81 15.378,69.295 15.739,69.656 30.926,69.656 31.781,68.8 47.6,68.8 47.657,68.857 47.825,68.857 v1(47.885,68.917) 47.97,68.917 48.088,68.8 48.314,68.8 260.172,68.8 261.028,69.656 264.483,69.656 264.761,69.377 264.761,68.81 265.071,68.5 J31.J1@265.339,68.5
SLOT7.LVDS_7_N: J5.C2 J31.C2 | length 273.7
  Top Layer w0.11: J5.C2@4.9,70.5 4.32,71.08 4.32,71.296 4.384,71.36 275.609,71.36 275.819,71.15 275.819,71.031 275.819,70.84 275.479,70.5 J31.C2@275.239,70.5
SLOT7.LVDS_7_P: J5.B2 J31.B2 | length 274.5
  Top Layer w0.11: J5.B2@3.5,70.5 4.08,71.08 4.08,71.419 4.261,71.6 275.708,71.6 276.059,71.249 276.059,70.931 276.059,70.84 276.399,70.5 J31.B2@276.639,70.5
SLOT7.LVDS_8_N: J5.F2 J31.F2 | length 265.3
  Bottom Layer w0.11: J5.F2@9.1,70.5 8.86,70.5 8.52,70.84 8.52,70.931 8.979,71.391 271.499,71.391 271.619,71.271 271.619,70.84 271.279,70.5 J31.F2@271.039,70.5
SLOT7.LVDS_8_P: J5.E2 J31.E2 | length 266.1
  Bottom Layer w0.11: J5.E2@7.7,70.5 7.94,70.5 8.28,70.84 8.28,71.031 8.88,71.631 271.599,71.631 271.859,71.37 271.859,70.84 272.199,70.5 J31.E2@272.439,70.5
SLOT7.LVDS_9_N: J5.I2 J31.I2 | length 257.8
  L3 w0.085: J5.I2@13.3,70.5 13.033,70.5 12.723,70.81 12.723,71.25 12.833,71.36 18.054,71.36 18.959,70.455 34.364,70.455 34.5,70.455 34.617,70.338 v1(34.703,70.338) 34.82,70.455 35.598,70.455 36.503,71.36 267.366,71.36 267.416,71.31 267.416,71.078 J31.I2@266.839,70.5
SLOT7.LVDS_9_P: J5.H2 J31.H2 | length 258.6
  L3 w0.085: J5.H2@11.9,70.5 12.167,70.5 12.478,70.81 12.478,71.351 12.731,71.605 18.155,71.605 19.06,70.7 34.263,70.7 34.5,70.7 34.617,70.818 v1(34.703,70.818) 34.82,70.7 35.497,70.7 36.402,71.605 267.468,71.605 267.661,71.412 267.661,71.078 J31.H2@268.239,70.5
SLOT7.LVDS_10_N: J5.L2 J31.L2 | length 249.5
  L4 w0.085: J5.L2@17.5,70.5 17.233,70.5 16.923,70.81 16.923,71.198 17.084,71.36 35.395,71.36 36.3,70.455 42.7,70.455 42.817,70.338 v1(42.901,70.338) 42.986,70.338 43.104,70.455 259.972,70.455 260.877,71.36 263.061,71.36 263.216,71.205 263.216,70.81 262.906,70.5 J31.L2@262.639,70.5
SLOT7.LVDS_10_P: J5.K2 J31.K2 | length 250.3
  L4 w0.085: J5.K2@16.1,70.5 16.367,70.5 16.678,70.81 16.678,71.3 16.983,71.605 35.497,71.605 36.402,70.7 42.7,70.7 42.818,70.818 v1(42.901,70.818) 42.986,70.818 43.104,70.7 259.87,70.7 260.775,71.605 263.162,71.605 263.461,71.306 263.461,70.81 263.771,70.5 J31.K2@264.039,70.5
SLOT7.LVDS_11_N: J6.B7 J11.B7 | length 276.7
  Bottom Layer w0.11: J6.B7@3.4,93.5 3.16,93.5 2.82,93.84 2.82,94.284 3.001,94.466 32.627,94.466 276.868,94.466 277.119,94.215 277.119,93.84 276.779,93.5 J11.B7@276.539,93.5
SLOT7.LVDS_11_P: J6.A7 J11.A7 | length 277.5
  Bottom Layer w0.11: J6.A7@2,93.5 2.24,93.5 2.58,93.84 2.58,94.384 2.902,94.706 32.627,94.706 276.968,94.706 277.359,94.315 277.359,93.84 277.699,93.5 J11.A7@277.939,93.5
SLOT7.LVDS_12_N: J6.E7 J11.E7 | length 268.2
  Top Layer w0.11: J6.E7@7.6,93.5 7.36,93.5 7.02,93.84 7.02,93.931 7.539,94.45 16.15,94.45 48.184,94.45 272.799,94.45 272.919,94.33 272.919,93.84 272.579,93.5 J11.E7@272.339,93.5
SLOT7.LVDS_12_P: J6.D7 J11.D7 | length 269
  Top Layer w0.11: J6.D7@6.2,93.5 6.44,93.5 6.78,93.84 6.78,94.031 7.439,94.69 16.15,94.69 48.188,94.69 272.898,94.69 273.159,94.429 273.159,93.84 273.499,93.5 J11.D7@273.739,93.5
SLOT7.LVDS_13_N: J6.H7 J11.H7 | length 261
  L3 w0.085: J6.H7@11.8,93.5 11.533,93.5 11.223,93.81 11.223,94.351 11.361,94.49 17.764,94.49 18.899,93.355 34.361,93.355 34.497,93.355 34.615,93.238 v1(34.7,93.238) 34.7,93.255 34.8,93.355 36.055,93.355 37.19,94.49 268.37,94.49 268.716,94.144 268.716,93.81 268.406,93.5 J11.H7@268.139,93.5
SLOT7.LVDS_13_P: J6.G7 J11.G7 | length 261.8
  L3 w0.085: J6.G7@10.4,93.5 10.667,93.5 10.978,93.81 10.978,94.453 11.26,94.735 17.865,94.735 19,93.6 34.26,93.6 34.497,93.6 34.615,93.718 v1(34.7,93.718) 34.7,93.7 34.8,93.6 35.954,93.6 37.088,94.735 268.472,94.735 268.961,94.246 268.961,93.81 269.271,93.5 J11.G7@269.539,93.5
SLOT7.LVDS_14_N: J6.K7 J11.K7 | length 252.3
  L4 w0.085: J6.K7@16,93.5 15.733,93.5 15.423,93.81 15.423,94.215 15.637,94.43 36.102,94.43 37.077,93.455 47.6,93.455 47.717,93.338 v1(47.8,93.338) 47.885,93.338 48.003,93.455 259.901,93.455 260.876,94.43 264.386,94.43 264.516,94.3 264.516,94.078 J11.K7@263.939,93.5
SLOT7.LVDS_14_P: J6.J7 J11.J7 | length 253.1
  L4 w0.085: J6.J7@14.6,93.5 14.867,93.5 15.178,93.81 15.178,94.317 15.536,94.675 36.204,94.675 37.178,93.7 47.6,93.7 47.718,93.818 v1(47.8,93.818) 47.885,93.818 48.003,93.7 259.8,93.7 260.775,94.675 264.488,94.675 264.761,94.402 264.761,94.078 J11.J7@265.339,93.5
SLOT8.LVDS_0_N: J3.B5 J29.B5 | length 276.6
  Bottom Layer w0.11: J3.B5@3.4,41.5 3.16,41.5 2.82,41.16 2.82,40.8 2.995,40.625 32.647,40.625 277.037,40.625 277.119,40.707 277.119,41.041 276.659,41.5 J29.B5@276.539,41.5
SLOT8.LVDS_0_P: J3.A5 J29.A5 | length 277.4
  Bottom Layer w0.11: J3.A5@2,41.5 2.24,41.5 2.58,41.16 2.58,40.701 2.896,40.385 32.647,40.385 277.136,40.385 277.359,40.608 277.359,41.041 277.818,41.5 J29.A5@277.939,41.5
SLOT8.LVDS_1_N: J3.E5 J29.E5 | length 268.2
  Top Layer w0.11: J3.E5@7.6,41.5 7.36,41.5 7.02,41.16 7.02,40.689 7.084,40.625 55.02,40.625 272.854,40.625 272.919,40.689 272.919,40.92 J29.E5@272.339,41.5
SLOT8.LVDS_1_P: J3.D5 J29.D5 | length 269
  Top Layer w0.11: J3.D5@6.2,41.5 6.44,41.5 6.78,41.16 6.78,40.59 6.985,40.385 55.02,40.385 272.954,40.385 273.159,40.59 273.159,40.92 J29.D5@273.739,41.5
SLOT8.LVDS_2_N: J3.K1 J29.K1 | length 252.2
  L4 w0.085: J3.K1@16,33.5 15.733,33.5 15.423,33.81 15.423,33.881 15.967,34.425 50.972,34.425 51.951,35.404 52.696,35.404 52.813,35.287 52.984,35.287 53.101,35.404 260.661,35.404 261.64,34.425 264.3,34.425 264.516,34.209 264.516,33.81 264.206,33.5 J29.K1@263.939,33.5
  other v1: 52.899,35.287
SLOT8.LVDS_2_P: J3.J1 J29.J1 | length 253.1
  L4 w0.085: J3.J1@14.6,33.5 14.867,33.5 15.178,33.81 15.178,33.982 15.865,34.67 50.87,34.67 51.849,35.649 52.696,35.649 52.753,35.707 52.881,35.707 v1@52.899,35.689 ; v1(52.899,35.767) v1@52.899,35.689 ; J29.J1@265.339,33.5 265.071,33.5 264.761,33.81 264.761,34.311 264.402,34.67 261.742,34.67 260.762,35.649 53.101,35.649 53.044,35.707 52.916,35.707 v1@52.899,35.689
SLOT8.LVDS_3_N: J3.I8 J29.I8 | length 260.3
  L3 w0.085: J3.I8@13.1,47.5 12.833,47.5 12.523,47.81 12.523,48.581 13.716,49.775 v1@29.597,49.775 ; v1(29.597,49.658) 29.683,49.658 29.8,49.775 29.932,49.775 31.301,49.775 32.326,50.8 266.416,50.8 267.416,49.799 267.416,48.078 J29.I8@266.839,47.5
SLOT8.LVDS_3_P: J3.H8 J29.H8 | length 261.1
  L3 w0.085: J3.H8@11.7,47.5 11.967,47.5 12.278,47.81 12.278,48.683 13.615,50.02 v1@29.597,50.02 ; v1(29.597,50.138) 29.683,50.138 29.8,50.02 30.034,50.02 31.2,50.02 32.225,51.045 266.517,51.045 267.661,49.901 267.661,48.078 J29.H8@268.239,47.5
SLOT8.LVDS_4_N: J3.L8 J29.L8 | length 250.1
  L4 w0.085: J3.L8@17.3,47.5 17.033,47.5 16.723,47.81 16.723,48.206 17.527,49.011 47.727,49.011 47.845,48.893 48.015,48.893 48.145,49.022 49.196,49.022 49.573,49.4 262.882,49.4 263.216,49.065 263.216,48.078 J29.L8@262.639,47.5
  other v1: 47.93,48.893
SLOT8.LVDS_4_P: J3.K8 J29.K8 | length 251
  L4 w0.085: J3.K8@15.9,47.5 16.167,47.5 16.478,47.81 16.478,48.307 17.426,49.256 47.727,49.256 47.785,49.313 47.913,49.313 47.93,49.296 v1(47.93,49.373) 48.015,49.373 48.121,49.267 49.094,49.267 49.472,49.645 262.983,49.645 263.461,49.167 263.461,48.078 J29.K8@264.039,47.5
SLOT8.LVDS_5_N: J5.H3 J31.H3 | length 260.4
  L3 w0.085: J5.H3@12,72.5 11.733,72.5 11.423,72.81 11.423,73.162 11.636,73.375 18.228,73.375 19.148,72.455 39.229,72.455 39.497,72.455 39.615,72.338 v1(39.7,72.338) 39.7,72.355 39.8,72.455 40.555,72.455 41.475,73.375 268.591,73.375 268.716,73.25 268.716,73.078 J31.H3@268.139,72.5
SLOT8.LVDS_5_P: J5.G3 J31.G3 | length 261.2
  L3 w0.085: J5.G3@10.6,72.5 10.867,72.5 11.178,72.81 11.178,73.264 11.534,73.62 18.329,73.62 19.249,72.7 39.128,72.7 39.497,72.7 39.615,72.818 v1(39.7,72.818) 39.7,72.8 39.8,72.7 40.454,72.7 41.374,73.62 268.693,73.62 268.961,73.352 268.961,73.078 J31.G3@269.539,72.5
SLOT8.LVDS_6_N: J5.K3 J31.K3 | length 252.1
  L4 w0.085: J5.K3@16.2,72.5 15.933,72.5 15.623,72.81 15.623,73.191 15.783,73.351 40.223,73.351 41.119,72.455 52.775,72.455 52.892,72.338 v1(52.925,72.338) 53.01,72.338 53.128,72.455 259.867,72.455 260.763,73.351 264.385,73.351 264.516,73.219 264.516,72.81 264.206,72.5 J31.K3@263.939,72.5
SLOT8.LVDS_6_P: J5.J3 J31.J3 | length 252.9
  L4 w0.085: J5.J3@14.8,72.5 15.067,72.5 15.378,72.81 15.378,73.292 15.681,73.596 40.324,73.596 41.22,72.7 52.775,72.7 52.892,72.818 v1(52.925,72.818) 53.01,72.818 53.128,72.7 259.766,72.7 260.662,73.596 264.486,73.596 264.761,73.321 264.761,72.81 265.071,72.5 J31.J3@265.339,72.5
SLOT8.LVDS_7_N: J5.C4 J31.C4 | length 274.8
  Bottom Layer w0.11: J5.C4@4.9,74.5 4.66,74.5 4.32,74.84 4.32,75.3 4.47,75.45 19.337,75.45 20.237,74.55 28.05,74.55 28.936,75.436 32.339,75.436 32.341,75.434 32.454,75.434 32.649,75.239 32.844,75.434 32.956,75.434 32.958,75.436 33.219,75.436 33.374,75.281 275.694,75.281 275.819,75.156 275.819,74.9 275.419,74.5 J31.C4@275.239,74.5
SLOT8.LVDS_7_P: J5.B4 J31.B4 | length 275.7
  Bottom Layer w0.11: J5.B4@3.5,74.5 3.74,74.5 4.08,74.84 4.08,75.399 4.371,75.69 19.437,75.69 20.336,74.79 27.951,74.79 28.837,75.676 32.339,75.676 32.341,75.679 32.844,75.679 ; 32.649,75.874 32.844,75.679 ; J31.B4@276.639,74.5 276.459,74.5 276.059,74.9 276.059,75.256 275.794,75.521 33.474,75.521 33.318,75.676 32.958,75.676 32.956,75.679 32.844,75.679
SLOT8.LVDS_8_N: J5.F4 J31.F4 | length 265.4
  Top Layer w0.11: J5.F4@9.1,74.5 8.86,74.5 8.52,74.84 8.52,75.22 8.75,75.45 44.999,75.45 271.307,75.45 271.619,75.139 271.619,75.031 271.619,74.84 271.279,74.5 J31.F4@271.039,74.5
SLOT8.LVDS_8_P: J5.E4 J31.E4 | length 266.2
  Top Layer w0.11: J5.E4@7.7,74.5 7.94,74.5 8.28,74.84 8.28,75.319 8.651,75.69 44.999,75.69 271.407,75.69 271.859,75.238 271.859,74.931 271.859,74.84 272.199,74.5 J31.E4@272.439,74.5
SLOT8.LVDS_9_N: J5.I4 J31.I4 | length 257.4
  L3 w0.085: J5.I4@13.3,74.5 13.033,74.5 12.723,74.81 12.723,75.09 12.902,75.269 17.945,75.269 18.759,74.455 29.32,74.455 29.48,74.455 29.597,74.338 v1(29.683,74.338) 29.711,74.338 29.828,74.455 30.781,74.455 31.594,75.269 267.22,75.269 267.378,75.11 267.378,75.04 J31.I4@266.839,74.5
SLOT8.LVDS_9_P: J5.H4 J31.H4 | length 258.2
  L3 w0.085: J5.H4@11.9,74.5 12.167,74.5 12.478,74.81 12.478,75.191 12.8,75.514 18.046,75.514 18.86,74.7 29.219,74.7 29.48,74.7 29.597,74.818 v1(29.683,74.818) 29.711,74.818 29.828,74.7 30.679,74.7 31.493,75.514 267.321,75.514 267.661,75.174 267.661,75.078 J31.H4@268.239,74.5
SLOT8.LVDS_10_N: J5.L4 J31.L4 | length 249.2
  L4 w0.085: J5.L4@17.5,74.5 17.233,74.5 16.923,74.81 16.923,75.076 17.084,75.238 30.535,75.238 31.345,74.428 47.518,74.428 47.709,74.428 47.826,74.31 v1(47.912,74.31) 47.997,74.31 48.114,74.428 48.284,74.428 260.474,74.428 261.284,75.238 263.122,75.238 263.216,75.143 263.216,74.81 262.906,74.5 J31.L4@262.639,74.5
SLOT8.LVDS_10_P: J5.K4 J31.K4 | length 250
  L4 w0.085: J5.K4@16.1,74.5 16.367,74.5 16.678,74.81 16.678,75.178 16.983,75.483 30.636,75.483 31.446,74.673 47.416,74.673 47.709,74.673 47.826,74.79 v1(47.912,74.79) 47.997,74.79 48.114,74.673 48.386,74.673 260.373,74.673 261.183,75.483 263.223,75.483 263.461,75.245 263.461,74.81 263.771,74.5 J31.K4@264.039,74.5
SLOT8.LVDS_11_N: J6.C8 J11.C8 | length 274.2
  Bottom Layer w0.11: J6.C8@4.7,95.5 4.46,95.5 4.12,95.84 4.12,96.344 4.276,96.5 27.635,96.5 275.488,96.5 275.819,96.169 275.819,96.031 275.819,95.84 275.479,95.5 J11.C8@275.239,95.5
SLOT8.LVDS_11_P: J6.B8 J11.B8 | length 275
  Bottom Layer w0.11: J6.B8@3.3,95.5 3.54,95.5 3.88,95.84 3.88,96.444 4.176,96.74 27.635,96.74 275.587,96.74 276.059,96.268 276.059,95.931 276.059,95.84 276.399,95.5 J11.B8@276.639,95.5